# Altium PCB PowerSupply.PcbDoc (part 1 of 2)
Units mm, origin at the board's own origin, x right, y up, seen from the top; angles counter-clockwise.
Board outline 97.5 x 39.25 mm, 2 copper layers (Top Layer, Bottom Layer); 55 components, 29 nets, 126 pads, 14 vias.
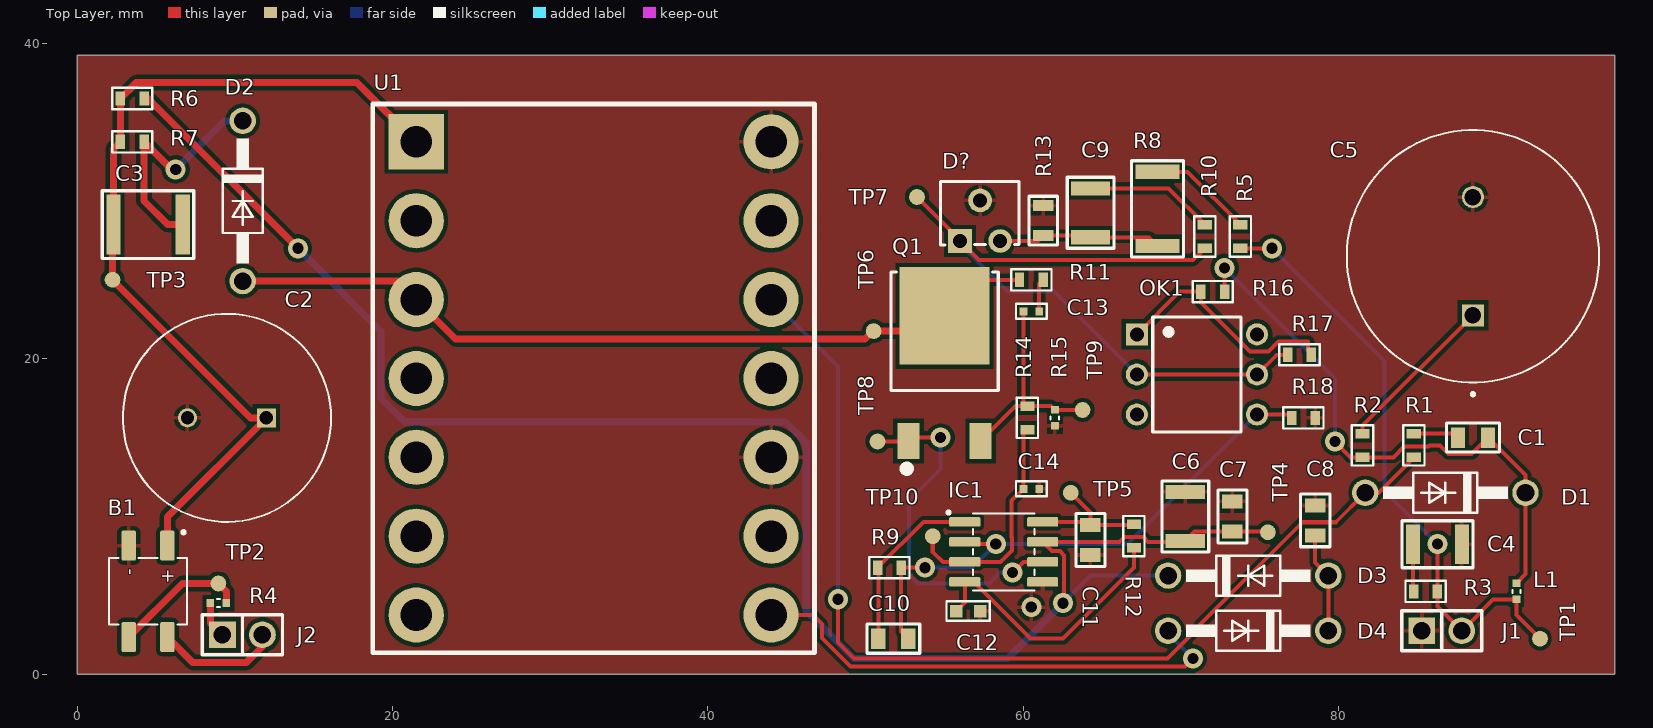
[diagram p0: Top Layer view]
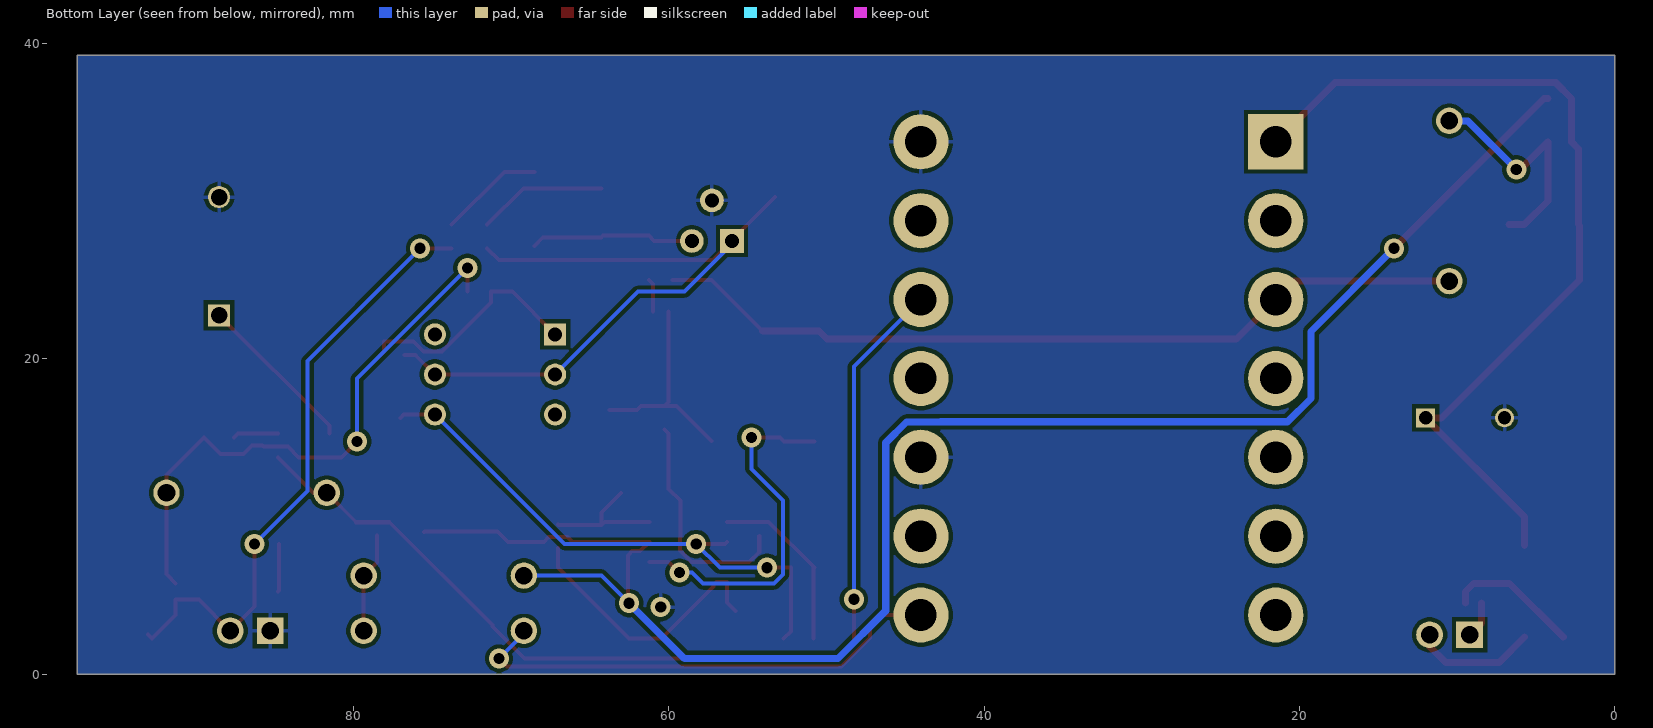
[diagram p1: Bottom Layer view, seen from below]

## Layer stack, top to bottom
Top Solder: solder mask 0.0102, Solder Resist, Dk 3.5
Top Layer: signal copper 0.0356
Dielectric 1: dielectric 0.32, FR-4, Dk 4.8
Bottom Layer: signal copper 0.0356
Bottom Solder: solder mask 0.0102, Solder Resist, Dk 3.5

## Board outline
0,0 97.5,0 97.5,39.25 0,39.25

## Design rules (kind name [scope] priority, off if disabled: settings)
Clearance [All] p1: gap=0.254 ignorepadtopadclearanceinfootprint=FALSE except(0: Arc-Hole Track-Hole SMDPad-Hole THPad-Hole Via-Hole Fill-Hole Poly-Hole Region-Hole Text-Hole)
Height [All] p1: minheight=0 maxheight=50 prefheight=5
PolygonConnect [All] p1: connectstyle=Relief reliefconductorwidth=0.254 reliefentries=4 polygonreliefangle="90 Angle" airgapwidth=0.254
RoutingVias [All] p1: holewidth=0.711 width=1.27 viastyle="Through Hole" minholewidth=0.711 minwidth=1.27 maxholewidth=0.711 maxwidth=1.27
SolderMaskExpansion [All] p1: expansion=0.102 istentingtop=FALSE
Width [All] p1: maxlimit=0.5 minlimit=0.254 preferedwidth=0.254
29 further rules are at their usual default settings.

## Components (designator, comment, footprint, x,y, rotation, side; value= is the part's Value field where it differs from the comment)
B1 "MB4S" MB4S 4.5,5.25 r270 top
C1 "1.5nF" C0805 88.5,15 r0 top
C2 "560uF" EEUFM1C222 9.5,16.25 r180 top
C3 "94nF" C1812 4.5,28.5 r180 top
C4 "100uF" C1210 86.25,8.25 r180 top
C5 "3.3mF" EEU-FC1A332S 88.5,26.5 r90 top
C6 "120uF" C1210 70.25,10 r270 top
C7 "22uF" C0805 73.25,10 r270 top
C8 "47uF" C0805 78.5,9.75 r270 top
C9 "4nF" C1210 64.25,29.25 r270 top
C10 "8nF" C0805 51.75,2.25 r180 top
C11 "10nF" C0805 64.25,8.5 r270 top
C12 "1.8n" C0603 56.5,4 r180 top
C13 "100pF" C0402 60.5,23 r0 top
C14 "100pF" C0402 60.5,11.75 r180 top
D1 "1N4004" 1N4004 86.75,11.5 r180 top
D2 "1N4004" 1N4004 10.5,30 r270 top
D3 "1N4004" 1N4004 74.25,6.25 r0 top
D4 "1N4004" 1N4004 74.25,2.75 r180 top
D? "TL431CZ-AP" TL431CZ-AP 57.25,28.75 r0 top
IC1 "UC3843D8" UC3843D8 58.75,7.75 r0 top
J1 "MC 1,5/ 2-G-3,81 P26 THR" "HEADER-1X2-FCI 77311-118-02LF" 85.25,2.75 r90 top
J2 "MC 1,5/ 2-G-3,81 P26 THR" "HEADER-1X2-FCI 77311-118-02LF" 9.21,2.5 r90 top
L1 "1nH" L0402 91.25,5.25 r270 top
OK1 "CNY17F-4" CNY17F-4 71,19 r0 top
Q1 "SIHD7N60E-GE3" SIHD7N60E-GE3 55,19.5 r0 top
R1 "50" R0603 84.75,14.5 r90 top
R2 "6m" R0603 81.5,14.5 r270 top
R3 "3.3m" R0603 85.5,5.25 r0 top
R4 "1R" R0402 8.96,4.5 r0 top
R5 "1.1k" R0603 73.75,27.75 r270 top
R6 "56k" R0603 3.5,36.5 r180 top
R7 "2.7k" R0603 3.5,33.75 r180 top
R8 "8.4k" R2010 68.5,29.5 r90 top
R9 "4K" R0603 51.5,6.75 r180 top
R10 "21k" R0603 71.5,27.75 r90 top
R11 "100" R0603 60.5,25 r180 top
R12 "6.8k" R0603 67,8.75 r90 top
R13 "2.49" R0805 61.25,28.75 r270 top
R14 "1k" R0603 60.25,16.25 r90 top
R15 "0R2" R0402 62,16.25 r90 top
R16 "2k" R0603 72,24.25 r0 top
R17 "1k" R0603 77.5,20.25 r180 top
R18 "2k" R0603 77.75,16.25 r0 top
TP1 "Vout" TestPoint 92.75,2.25 r0 top
TP2 "Vin-AC" TestPoint 8.96,5.75 r180 top
TP3 "Vin_DC" TestPoint 2.25,25 r90 top
TP4 "Vcc" TestPoint 75.5,9 r90 top
TP5 "Vref" TestPoint 63,11.5 r90 top
TP6 "Vd" TestPoint 50.5,21.75 r90 top
TP7 "Ver" TestPoint 53.25,30.25 r90 top
TP8 "Vg" TestPoint 50.75,14.75 r90 top
TP9 "Vs" TestPoint 63.75,16.75 r90 top
TP10 "Isense" TestPoint 54.25,8.75 r90 top
U1 "TF351-2C-2/12VDC" TF351-2C-2/12VDC 32.75,18.75 r0 top

## Footprints (in the part's own frame and the unit in brackets; to place one, negate y for a bottom-side part, rotate by r counter-clockwise, add the part's x,y. Pads: shape width x height; smd on the part's side, far side on the other; paste and mask are expansions set on the pad)
1N4004 [mil]
  round 66 hole 44: A(200,0) C(-200,0)
  silkscreen extent -155,-50 155,50, body extent -211,-53 203,53, height 110
C0402 [mm] "Guidelines for Footprint Design - Walsin Technology Corporation"
  rect 0.5x0.5 smd: 1(-0.5,0) 2(0.5,0)
  silkscreen extent -0.97,-0.48 0.97,0.48, body extent -0.5,-0.25 0.5,0.25, height 0.48
C0603 [mm] "Guidelines for Footprint Design - Walsin Technology Corporation"
  rect 0.8x0.8 smd: 1(-0.75,0) 2(0.75,0)
  silkscreen extent -1.38,-0.63 1.38,0.63, body extent -0.8,-0.4 0.8,0.4, height 0.79
C0805 [mm] "Guidelines for Footprint Design - Walsin Technology Corporation"
  rect 0.9x1.3 smd: 1(-0.95,0) 2(0.95,0)
  silkscreen extent -1.68,-0.92 1.68,0.92, body extent -1,-0.62 1,0.63, height 0.59
C1210 [mm]
  rect 0.9x2.5 smd: 1(-1.55,0) 2(1.55,0)
  silkscreen extent -2.25,-1.48 2.25,1.5, body extent -1.6,-1.25 1.6,1.25, height 0.79
C1812 [mm]
  rect 0.9x3.8 smd: 1(-2.2,0) 2(2.2,0)
  silkscreen extent -2.9,-2.15 2.9,2.15, body extent -2.25,-1.6 2.25,1.6, height 1
CNY17F-4 [mm]
  rect 1.4x1.4 hole 0.9: A(-3.81,2.54)
  round 1.4 hole 0.9: B(3.81,2.54) C(-3.81,0) C(3.81,0) E(3.81,-2.54) NC(-3.81,-2.54)
  silkscreen extent -2.8,-3.65 2.8,3.65, body extent -3.93,-4.27 3.94,4.27, height 5.89
EEU-FC1A332S [mm]
  round 1.4 hole 1.05: N(3.75,0)
  rect 1.4x1.4 / inner round 1.4 / far side rect 1.4x1.4 hole 1.05: P(-3.75,0)
  silkscreen extent -8.85,-8 8,8, body extent -8,-8 8,8, height 20
EEUFM1C222 [mm]
  round 1.2 hole 0.85: N(2.5,0)
  rect 1.2x1.2 hole 0.85: P(-2.5,0)
  silkscreen extent -6.6,-6.6 6.6,6.6, body extent -6.25,-6.25 6.25,6.25, height 25
"HEADER-1X2-FCI 77311-118-02LF" [mm]
  rect 1.7x1.7 hole 1.1: 1(0,0)
  round 1.7 hole 1.1: 2(0,-2.54)
  silkscreen extent -1.27,-3.81 1.27,1.27, body extent -1.27,-3.81 1.27,1.27, height 11.94
L0402 [mm]
  rect 0.475x0.5 smd: 1(-0.512,0) 2(0.512,0)
  silkscreen extent -0.1,-0.25 0.1,0.28, body extent -0.5,-0.25 0.5,0.25, height 0.56
MB4S [mm]
  rrect23% 1.91x0.91 smd: 1(-2.9,1.225) 2(-2.9,-1.225) 3(2.9,-1.225) 4(2.9,1.225)
  silkscreen extent -3.85,-2.48 2.1,2.48, body extent -3.35,-2.36 3.35,2.36, height 2.71
R0402 [mm]
  rect 0.475x0.5 smd: 1(-0.512,0) 2(0.512,0)
  silkscreen extent -0.1,-0.25 0.1,0.28, body extent -0.5,-0.25 0.5,0.25, height 0.35
R0603 [mm] "Guidelines for Footprint Design - Walsin Technology Corporation"
  rect 0.6x0.9 smd: 1(-0.75,0) 2(0.75,0)
  silkscreen extent -1.28,-0.67 1.28,0.67, body extent -0.8,-0.4 0.8,0.4, height 0.44
R0805 [mm] "Guidelines for Footprint Design - Walsin Technology Corporation"
  rect 0.7x1.3 smd: 1(-0.95,0) 2(0.95,0)
  silkscreen extent -1.55,-0.9 1.55,0.9, body extent -1,-0.62 1,0.65, height 0.59
R2010 [mm]
  rect 0.9x2.8 smd: 1(-2.35,0) 2(2.35,0)
  silkscreen extent -3.05,-1.65 3.05,1.65, body extent -2.5,-1.25 2.5,1.25, height 0.6
SIHD7N60E-GE3 [mil]
  rect 224.02x243.31 smd: D(0,126.67)
  rect 55x90 smd: G(-90,-185.73) S(90,-185.73)
  silkscreen extent -134,-263 134,236, body extent -133,-223 133,236, height 97
TestPoint [mm]
  round 1 smd paste-10 mask+0.1: 1(0,0)
TF351-2C-2/12VDC [mm]
  rect 3.5x3.5 hole 2: 1(-11.25,15)
  round 3.5 hole 2: 2(-11.25,10) 3(-11.25,5) 4(-11.25,0) 5(-11.25,-5) 6(-11.25,-10) 7(-11.25,-15) 8(11.25,15) 9(11.25,10) 10(11.25,5) 11(11.25,0) 12(11.25,-5) 13(11.25,-10) 14(11.25,-15)
  silkscreen extent -14,-17.4 14,17.4, body extent -14,-17.4 14,17.4, height 36.27
TL431CZ-AP [mm]
  round 1.5 hole 0.9: A(-0.002,1.288) R(1.273,-1.287)
  rect 1.5x1.5 hole 0.9: C(-1.272,-1.287)
  silkscreen extent -2.5,-1.54 2.47,2.49, body extent -2.48,-1.53 2.47,2.5, height 5.42
UC3843D8 [mm]
  rrect25% 1.97x0.6 smd: 1(-2.47,1.905) 2(-2.47,0.635) 3(-2.47,-0.635) 4(-2.47,-1.905) 5(2.47,-1.905) 6(2.47,-0.635) 7(2.47,0.635) 8(2.47,1.905)
  silkscreen extent -3.6,-2.45 1.95,2.6, body extent -3,-2.45 3,2.45, height 1.75

## Part data
B1: "Rectifier Bridge Diode Single 400V 0.5A 4-Pin SOIC N T/R / IC RECT BRIDGE 0.5A 400V 4SOIC", Manufacturer="ON Semiconductor / Fairchild", Reverse Voltage=400V, Category="Rectifier Diodes", ComponentLink1Description=https://datasheet.ciiva.com/4433/mb4s-186124-4433195.pdf?src-supplier=Mouser, ComponentLink1URL=https://datasheet.ciiva.com/4433/mb4s-186124-4433195.pdf?src-supplier=Mouser, ComponentLink2Description=https://datasheet.ciiva.com/17038/mb4s-17038344.pdf?src-supplier=Future+Electronics, ComponentLink2URL=https://datasheet.ciiva.com/17038/mb4s-17038344.pdf?src-supplier=Future+Electronics, ComponentLink3Description=https://datasheet.ciiva.com/1197/1794557-1197746.pdf?src-supplier=Farnell, ComponentLink3URL=https://datasheet.ciiva.com/1197/1794557-1197746.pdf?src-supplier=Farnell, ComponentLink4Description=https://datasheet.ciiva.com/15145/getdatasheetpartid-117252-15145288.pdf?src-supplier=Verical, ComponentLink4URL=https://datasheet.ciiva.com/15145/getdatasheetpartid-117252-15145288.pdf?src-supplier=Verical, ComponentLink5Description=https://datasheet.ciiva.com/11195/mb8s-11195767.pdf?src-supplier=Avnet, ComponentLink5URL=https://datasheet.ciiva.com/11195/mb8s-11195767.pdf?src-supplier=Avnet, ComponentLink6Description=https://datasheet.ciiva.com/8018/1827136-8018971.pdf?src-supplier=Element14, ComponentLink6URL=https://datasheet.ciiva.com/8018/1827136-8018971.pdf?src-supplier=Element14, ComponentLink7Description=https://datasheet.ciiva.com/43505/974489-43505307.pdf?src-supplier=Jameco, ComponentLink7URL=https://datasheet.ciiva.com/43505/974489-43505307.pdf?src-supplier=Jameco, ComponentLink8Description=https://datasheet.ciiva.com/885/mb1s-885510.pdf?src-supplier=Digikey, ComponentLink8URL=https://datasheet.ciiva.com/885/mb1s-885510.pdf?src-supplier=Digikey, ComponentLink9Description=https://datasheet.ciiva.com/885/mb1s-885511.pdf?src-supplier=Digikey, ComponentLink9URL=https://datasheet.ciiva.com/885/mb1s-885511.pdf?src-supplier=Digikey, ComponentLink10Description=https://datasheet.ciiva.com/885/mb1s-885512.pdf?src-supplier=Digikey, ComponentLink10URL=https://datasheet.ciiva.com/885/mb1s-885512.pdf?src-supplier=Digikey, ComponentLink11Description=https://datasheet.ciiva.com/11195/mb8s-11195766.pdf?src-supplier=Avnet, ComponentLink11URL=https://datasheet.ciiva.com/11195/mb8s-11195766.pdf?src-supplier=Avnet, Manufacturer Part Number=MB4S, Pricing 1="3000=0.114, 6000=0.111, 9000=0.11, 12000=0.109, 15000=0.106, 45000=0.106 (USD)", RoHS=Yes, Stock 1=6000, Supplier 1="Future Electronics"
C1: library part GRM21A5C2E152FWA1J, "General Up to 125C Reflow soldering Flow soldering", Manufacturer=Murata, Category="Ceramic Capacitors", Manufacturer Part Number=GRM21A5C2E152FWA1J, Pricing 1="1=0.29, 10=0.206, 50=0.206, 100=0.124, 1000=0.078, 10000=0.064 (USD)", RoHS=Yes, Stock 1=9850, Supplier 1=Mouser
C2: library part EEU-FM1C222, "Aluminum Electrolytic Capacitor, Polarized, Aluminum (wet), 25V, 20% +Tol, 20% -Tol, 560uF", Manufacturer=Panasonic, Voltage Rating (AC)=16V, Category="Aluminum Electrolytic Capacitors", ComponentLink1Description=https://datasheet.ciiva.com/11778/0900766b805f3abe-11778660.pdf?src-supplier=Rs, ComponentLink1URL=https://datasheet.ciiva.com/11778/0900766b805f3abe-11778660.pdf?src-supplier=Rs, ComponentLink2Description=https://datasheet.ciiva.com/24023/a-e-461514-24023525.pdf?src-supplier=Mouser, ComponentLink2URL=https://datasheet.ciiva.com/24023/a-e-461514-24023525.pdf?src-supplier=Mouser, ComponentLink3Description=https://datasheet.ciiva.com/10685/aba0000ce108-10685660.pdf?src-supplier=Avnet, ComponentLink3URL=https://datasheet.ciiva.com/10685/aba0000ce108-10685660.pdf?src-supplier=Avnet, ComponentLink4Description=https://datasheet.ciiva.com/46371/26036-46371896.pdf?src-supplier=Element14, ComponentLink4URL=https://datasheet.ciiva.com/46371/26036-46371896.pdf?src-supplier=Element14, ComponentLink5Description=https://datasheet.ciiva.com/94/aba0000ce108-94216.pdf?src-supplier=Digi-Key, ComponentLink5URL=https://datasheet.ciiva.com/94/aba0000ce108-94216.pdf?src-supplier=Digi-Key, ComponentLink6Description=https://datasheet.ciiva.com/30235/aba0000ce108-30235055.pdf?src-supplier=Onlinecomponents.com, ComponentLink6URL=https://datasheet.ciiva.com/30235/aba0000ce108-30235055.pdf?src-supplier=Onlinecomponents.com, ComponentLink7Description=https://datasheet.ciiva.com/14601/70068540-14601135.pdf?src-supplier=Allied+Electronics, ComponentLink7URL=https://datasheet.ciiva.com/14601/70068540-14601135.pdf?src-supplier=Allied+Electronics, ComponentLink8Description=https://datasheet.ciiva.com/16210/aba0000ce108-16210090.pdf?src-supplier=Future+Electronics, ComponentLink8URL=https://datasheet.ciiva.com/16210/aba0000ce108-16210090.pdf?src-supplier=Future+Electronics, Dissipation Factor=18%, Manufacturer Part Number=EEU-FM1C222, Pricing 1="1=1.04, 10=0.657, 50=0.657, 100=0.529, 1000=0.411, 10000=0.367 (USD)", RoHS=Yes, Stock 1=1570, Supplier 1=Mouser
C3: library part C1812C943KBGLCAUTO, "Cap, AEC-Q200, 0.094UF, 630V, 1812;", Manufacturer=KEMET, Manufacturer Part Number=C1812C943KBGLCAUTO, Pricing 1="1=3.57, 10=2.75, 50=2.48, 100=2.13, 1000=1.56, 10000=1.47 (USD)", RoHS=No, Stock 1=405, Supplier 1=Mouser
C4: library part GRM32ER60J107ME20L, "Multilayer Ceramic Capacitor, 100 uF, 6.3 V, ± 20%, X5R, 1210 [3225 Metric]", Case Code (Imperial)=1210, Case Code (Metric)=3225, Dielectric=X5R, Manufacturer=Murata, Max Operating Temperature=85°C, Min Operating Temperature=-55°C, Package Quantity=1, Tolerance=20%, Voltage=6.3V, Capacitance=100uF, Case/Package=1210, Category="Ceramic Capacitors", Depth=2.5mm, Height=2.5mm, Lead Free="Lead Free", Length=3.2mm, Manufacturer Part Number=GRM32ER60J107ME20L, Material=Ceramic, Mount="Surface Mount", Number of Pins=2, Packaging="Cut Tape", Pricing 1="1=1.4534, 10=1.0931, 25=0.9871, 100=0.5195 (USD)", Reach SVHC Compliant=No, RoHS=Yes, RoHS Compliant=Yes, Series=GRM, Stock 1=177, Supplier 1="Arrow Electronics", Termination=SMD/SMT, Thickness=0.106inch, Voltage Rating=6.3V, Voltage Rating (DC)=6.3V, Width=0.098inch
C5: library part EEU-FC1A332S, "Cap Aluminum 3300uF 10V 20% (16 X 20mm) Radial 7.5mm 2205mA 5000h 105°C Bulk", Case/Package=Radial, ESR (Equivalent Series Resistance)=29mR, Leakage Current=3uA, Manufacturer=Panasonic, Max Operating Temperature=105°C, Min Operating Temperature=-55°C, Package Quantity=100, Ripple Current=2.205A, Tolerance=20%, Voltage=10V, Capacitance=3.3mF, Category="Aluminum Electrolytic Capacitors", ComponentLink1Description=https://datasheet.ciiva.com/11781/0900766b80becf93-11781127.pdf?src-supplier=Rs, ComponentLink1URL=https://datasheet.ciiva.com/11781/0900766b80becf93-11781127.pdf?src-supplier=Rs, ComponentLink2Description=https://datasheet.ciiva.com/7961/aba0000ce22-7961340.pdf?src-supplier=Element14, ComponentLink2URL=https://datasheet.ciiva.com/7961/aba0000ce22-7961340.pdf?src-supplier=Element14, ComponentLink3Description=https://datasheet.ciiva.com/43470/1790611-43470763.pdf?src-supplier=Farnell, ComponentLink3URL=https://datasheet.ciiva.com/43470/1790611-43470763.pdf?src-supplier=Farnell, ComponentLink4Description=https://datasheet.ciiva.com/46379/1790611-46379261.pdf?src-supplier=Element14, ComponentLink4URL=https://datasheet.ciiva.com/46379/1790611-46379261.pdf?src-supplier=Element14, ComponentLink5Description=https://datasheet.ciiva.com/24068/a-e-461514-24068731.pdf?src-supplier=Mouser, ComponentLink5URL=https://datasheet.ciiva.com/24068/a-e-461514-24068731.pdf?src-supplier=Mouser, ComponentLink6Description=https://datasheet.ciiva.com/14590/70068429-14590057.pdf?src-supplier=Allied+Electronics, ComponentLink6URL=https://datasheet.ciiva.com/14590/70068429-14590057.pdf?src-supplier=Allied+Electronics, ComponentLink7Description=https://datasheet.ciiva.com/11677/aba0000ce22-11677685.pdf?src-supplier=Avnet, ComponentLink7URL=https://datasheet.ciiva.com/11677/aba0000ce22-11677685.pdf?src-supplier=Avnet, ComponentLink8Description=https://datasheet.ciiva.com/15166/getdatasheetpartid-178475-15166218.pdf?src-supplier=Verical, ComponentLink8URL=https://datasheet.ciiva.com/15166/getdatasheetpartid-178475-15166218.pdf?src-supplier=Verical, ComponentLink9Description=https://datasheet.ciiva.com/30242/aba0000ce22-30242043.pdf?src-supplier=Onlinecomponents.com, ComponentLink9URL=https://datasheet.ciiva.com/30242/aba0000ce22-30242043.pdf?src-supplier=Onlinecomponents.com, ComponentLink10Description=https://datasheet.ciiva.com/29243/421921-da-01-en-elko-fc-3300uf-10v-105c-29243146.pdf?src-supplier=Conrad, ComponentLink10URL=https://datasheet.ciiva.com/29243/421921-da-01-en-elko-fc-3300uf-10v-105c-29243146.pdf?src-supplier=Conrad, Construction=RADIAL, Diameter=16mm, Dissipation Factor=0.19%, Height=20mm, Height - Seated (Max)=0.787inch, Impedance=29mR, Lead Diameter=0.8mm, Lead Free="Lead Free", Lead Pitch=7.5mm, Length=20mm, Life (Hours)=5000Hour, Manufacturer Part Number=EEU-FC1A332S, Mount="Through Hole,PCB", Packaging=Bulk, Pricing 1="1=1.36, 10=0.888, 50=0.888, 100=0.694, 1000=0.536, 10000=0.482 (USD)", Radiation Hardening=No, Reach SVHC Compliant=Unknown, RoHS=Yes, RoHS Compliant=Yes, Series=FC, Stock 1=15, Supplier 1=Mouser, Termination=Radial, Voltage Rating=10V, Voltage Rating (DC)=10V
C6: library part 6TPE120MAZB, "120uF SMD Solid Polymer Tantalum Capacitor; 6.3 V dc +/-20%; POSCAP Series", Manufacturer=Panasonic, Category="Polymer Capacitors", ComponentLink1Description=https://datasheet.ciiva.com/22745/1734363-22745336.pdf?src-supplier=Element14, ComponentLink1URL=https://datasheet.ciiva.com/22745/1734363-22745336.pdf?src-supplier=Element14, ComponentLink2Description=https://datasheet.ciiva.com/25785/1734363-25785911.pdf?src-supplier=Farnell, ComponentLink2URL=https://datasheet.ciiva.com/25785/1734363-25785911.pdf?src-supplier=Farnell, ComponentLink3Description=https://datasheet.ciiva.com/24378/tpe-series-datasheet-24378493.pdf?src-supplier=Onlinecomponents.com, ComponentLink3URL=https://datasheet.ciiva.com/24378/tpe-series-datasheet-24378493.pdf?src-supplier=Onlinecomponents.com, Life (Hours)=1000Hour, Manufacturer Part Number=6TPE120MAZB, Pricing 1="1=1.09, 10=0.797, 50=0.797, 100=0.631, 1000=0.45, 10000=0.39 (USD)", RoHS=Yes, Stock 1=2995, Supplier 1=Mouser
C7: library part GRM21BR60J226ME39L, "Multilayer Ceramic Capacitors MLCC Surface Mount 0805 22uF 6.3 Volts X5R 20%", Case Code (Imperial)=0805, Case Code (Metric)=2012, Dielectric=X5R, Manufacturer=Murata, Max Operating Temperature=85°C, Min Operating Temperature=-55°C, Package Quantity=1, Tolerance=20%, Voltage=6.3V, Capacitance=22uF, Case/Package=0805, Category="Ceramic Capacitors", Construction=Flat, Depth=1.25mm, Height=1.25mm, Lead Free="Lead Free", Length=2mm, Manufacturer Part Number=GRM21BR60J226ME39L, Material=Ceramic, Mount="Surface Mount", Packaging="Tape and Reel", Pricing 1="3000=0.0699, 6000=0.0677, 9000=0.054, 15000=0.039, 30000=0.037, 75000=0.033, 150000=0.0327 (USD)", Radiation Hardening=No, Reach SVHC Compliant=No, RoHS=Yes, RoHS Compliant=Yes, Series=GRM, Stock 1=282000, Supplier 1="Arrow Electronics", Termination=SMD/SMT, Thickness=0.053inch, Voltage Rating=6.3V, Voltage Rating (DC)=6.3V, Width=0.049inch
C8: library part JMK212BJ476MG-T, "Multilayer Ceramic Capacitors MLCC - SMD/SMT 47uF 6.3V X5R +/-20% 0805 Gen Purp", Case Code (Imperial)=0805, Case Code (Metric)=2012, Dielectric=X5R, Manufacturer="Taiyo Yuden", Max Operating Temperature=85°C, Min Operating Temperature=-55°C, Tolerance=20%, Voltage Rating=6.3V, Capacitance=47uF, Case/Package=0805, Category="Ceramic Capacitors", Construction=Flat, Depth=1.25mm, Height=1.25mm, Lead Free="Lead Free", Length=2mm, Manufacturer Part Number=JMK212BJ476MG-T, Mount="Surface Mount", Number of Pins=2, Packaging="Tape and Reel", Pricing 1="3000=0.11801, 6000=0.11536, 12000=0.11006, 18000=0.10741, 24000=0.10475 (USD)", Radiation Hardening=No, Reach SVHC Compliant=Unknown, RoHS=Yes, RoHS Compliant=Yes, Series=M, Stock 1=159000, Supplier 1=Avnet, Termination=SMD/SMT, Voltage Rating (DC)=6.3V
C9: library part B72530T0060M062, "Epcos CT Series Metal OxideVaristor 4nF 2.5A, Clamping 25V, Varistor 11V 1210 Case", Case/Package=1210, Clamping Current=2.5A, Clamping Voltage=25V, Manufacturer="TDK EPCOS", Max Operating Temperature=125°C, Max Surge Current=300A, Max Varistor Voltage=13.2V, Max Voltage Rating (AC)=6V, Max Voltage Rating (DC)=8V, Min Operating Temperature=-55°C, Min Varistor Voltage=8.8V, Varistor Voltage=11V, Capacitance=4nF, Category=Varistors, ComponentLink1Description=https://datasheet.ciiva.com/26819/getdatasheetpartid-382608-26819931.pdf?src-supplier=Verical, ComponentLink1URL=https://datasheet.ciiva.com/26819/getdatasheetpartid-382608-26819931.pdf?src-supplier=Verical, Depth=2.5mm, Energy=0.7J, Length=3.2mm, Manufacturer Part Number=B72530T0060M062, Mount="Surface Mount", Number of Circuits=1, Packaging="Tape and Reel", Pricing 1="5=5, 50=1.5, 250=1.26, 500=1.02, 1500=1 (EUR)", RoHS=Yes, RoHS Compliant=Yes, Series=-, Size Code=1210, Stock 1=1532, Supplier 1=Farnell
C10: library part C0805C103K2RACTU, "Multilayer Ceramic Capacitor, 0.01 uF, 200 V, ± 10%, X7R, 0805 [2012 Metric]", Capacitance=10nF, Case Code (Imperial)=0805, Case Code (Metric)=2012, Dielectric=X7R, Manufacturer=KEMET, Max Operating Temperature=125°C, Min Operating Temperature=-55°C, Package Quantity=4000, Temperature Coefficient=30ppm/°C, Tolerance=10%, Voltage Rating=200V, Case/Package=0805, Category="Ceramic Capacitors", ComponentLink1Description=https://datasheet.ciiva.com/22700/1851736-22700517.pdf?src-supplier=Element14, ComponentLink1URL=https://datasheet.ciiva.com/22700/1851736-22700517.pdf?src-supplier=Element14, ComponentLink2Description=https://datasheet.ciiva.com/28672/1851736-28672827.pdf?src-supplier=Element14, ComponentLink2URL=https://datasheet.ciiva.com/28672/1851736-28672827.pdf?src-supplier=Element14, Construction=Flat, Depth=1.25mm, Dissipation Factor=2.5%, Height=0.78mm, Lead Pitch=0.75mm, Length=2mm, Manufacturer Part Number=C0805C103K2RACTU, Material=4241ConductorMaterial, Mount="Surface Mount", Number of Pins=2, Packaging="Tape and Reel", Pricing 1="1=0.18, 10=0.128, 50=0.128, 100=0.06, 1000=0.035, 10000=0.026 (USD)", Radiation Hardening=No, Reach SVHC Compliant=No, RoHS=Yes, RoHS Compliant=Yes, Series="SMD Comm X7R", Stock 1=28830, Supplier 1=Mouser, Termination=SMD/SMT, Thickness=0.035inch, Voltage Rating (DC)=200V, Width=1.2mm
C11: library part C0805C103K2RACTU, "Multilayer Ceramic Capacitor, 0.01 uF, 200 V, ± 10%, X7R, 0805 [2012 Metric]", Case Code (Imperial)=0805, Case Code (Metric)=2012, Dielectric=X7R, Manufacturer=KEMET, Max Operating Temperature=125°C, Min Operating Temperature=-55°C, Package Quantity=4000, Temperature Coefficient=30ppm/°C, Tolerance=10%, Voltage Rating=200V, Capacitance=10nF, Case/Package=0805, Category="Ceramic Capacitors", ComponentLink1Description=https://datasheet.ciiva.com/22700/1851736-22700517.pdf?src-supplier=Element14, ComponentLink1URL=https://datasheet.ciiva.com/22700/1851736-22700517.pdf?src-supplier=Element14, ComponentLink2Description=https://datasheet.ciiva.com/28672/1851736-28672827.pdf?src-supplier=Element14, ComponentLink2URL=https://datasheet.ciiva.com/28672/1851736-28672827.pdf?src-supplier=Element14, Construction=Flat, Depth=1.25mm, Dissipation Factor=2.5%, Height=0.78mm, Lead Pitch=0.75mm, Length=2mm, Manufacturer Part Number=C0805C103K2RACTU, Material=4241ConductorMaterial, Mount="Surface Mount", Number of Pins=2, Packaging="Tape and Reel", Pricing 1="1=0.18, 10=0.128, 50=0.128, 100=0.06, 1000=0.035, 10000=0.026 (USD)", Radiation Hardening=No, Reach SVHC Compliant=No, RoHS=Yes, RoHS Compliant=Yes, Series="SMD Comm X7R", Stock 1=28830, Supplier 1=Mouser, Termination=SMD/SMT, Thickness=0.035inch, Voltage Rating (DC)=200V, Width=1.2mm
C12: library part GRM1885C1H112JA01D, "Multilayer Ceramic Capacitor, 1100 pF, 50 V, ± 5%, C0G (NP0), 0603 [1608 Metric]", Manufacturer=Murata, Temperature Coefficient=30ppm/°C, Category="Ceramic Capacitors", ComponentLink1Description=https://datasheet.ciiva.com/133/product-133472.pdf?src-supplier=Digikey, ComponentLink1URL=https://datasheet.ciiva.com/133/product-133472.pdf?src-supplier=Digikey, ComponentLink2Description=https://datasheet.ciiva.com/11621/product-11621253.pdf?src-supplier=Avnet, ComponentLink2URL=https://datasheet.ciiva.com/11621/product-11621253.pdf?src-supplier=Avnet, ComponentLink3Description=https://datasheet.ciiva.com/133/partnumbering-e-01-133471.pdf?src-supplier=Digikey, ComponentLink3URL=https://datasheet.ciiva.com/133/partnumbering-e-01-133471.pdf?src-supplier=Digikey, ComponentLink4Description=https://datasheet.ciiva.com/133/partnumbering-e-01-133473.pdf?src-supplier=Digikey, ComponentLink4URL=https://datasheet.ciiva.com/133/partnumbering-e-01-133473.pdf?src-supplier=Digikey, Manufacturer Part Number=GRM1885C1H112JA01D, Pricing 1="4000=0.0091, 8000=0.0082, 24000=0.0072, 100000=0.0055 (USD)", RoHS=Yes, Stock 1=40000, Supplier 1="Arrow Electronics"
C13 C14: library part GRM1555C1H101JA01D, "Multilayer Ceramic Capacitor, 100 pF, 50 V, ± 5%, C0G (NP0), 0402 [1005 Metric]", Case Code (Imperial)=0402, Case Code (Metric)=1005, Dielectric=C0G, Manufacturer=Murata, Max Operating Temperature=125°C, Min Operating Temperature=-55°C, Package Quantity=1, Tolerance=5%, Voltage=50V, Capacitance=100pF, Case/Package=0402, Category="Ceramic Capacitors", Construction=Flat, Depth=0.5mm, Height=0.5mm, Lead Free="Lead Free", Length=1mm, Manufacturer Part Number=GRM1555C1H101JA01D, Material=Ceramic, Mount="Surface Mount", Packaging="Tape and Reel", Pricing 1="10000=0.004, 20000=0.0035, 30000=0.0034, 50000=0.003, 100000=0.0024, 250000=0.002 (USD)", Radiation Hardening=No, Reach SVHC Compliant=No, RoHS=Yes, RoHS Compliant=Yes, Series=GRM, Stock 1=6040000, Supplier 1="Arrow Electronics", Termination=SMD/SMT, Thickness=0.022inch, Voltage Rating=50V, Voltage Rating (DC)=50V, Width=0.02inch
D1 D2 D3 D4: "Rectifier Diode, 1 Element, 1A, 400V V(RRM), Silicon, DO-41", Manufacturer=Diotec, Category="Rectifier Diodes", ComponentLink1Description=https://datasheet.ciiva.com/18711/1n400x-eng-tds-18711215.pdf?src-supplier=Distrelec, ComponentLink1URL=https://datasheet.ciiva.com/18711/1n400x-eng-tds-18711215.pdf?src-supplier=Distrelec, ComponentLink2Description=https://datasheet.ciiva.com/29316/162248-da-01-ml-1n4004-silizium-diode-de-en-29316437.pdf?src-supplier=Conrad, ComponentLink2URL=https://datasheet.ciiva.com/29316/162248-da-01-ml-1n4004-silizium-diode-de-en-29316437.pdf?src-supplier=Conrad, Manufacturer Part Number=1N4004, Pricing 1="1=0.1, 10=0.068, 50=0.068, 100=0.057, 1000=0.039, 10000=0.019 (USD)", RoHS=Yes, Stock 1=64524, Supplier 1=Mouser
D?: "V-Ref Adjustable 2.495V to 36V 100mA 3-Pin TO-92 Ammo", Case/Package=TO-92, Cathode Current=1mA, Manufacturer=STMicroelectronics, Max Input Voltage=37V, Max Operating Temperature=70°C, Max Output Current=100mA, Max Output Voltage=36V, Min Operating Temperature=0°C, Min Output Voltage=2.495V, Package Quantity=2000, Temperature Coefficient=100ppm/°C, Tolerance=2.21%, Accuracy=2%, Category="Voltage References", ComponentLink1Description=https://datasheet.ciiva.com/4909/cd00000986-4909435.pdf?src-supplier=Mouser, ComponentLink1URL=https://datasheet.ciiva.com/4909/cd00000986-4909435.pdf?src-supplier=Mouser, ComponentLink2Description=https://datasheet.ciiva.com/2011/cd00000986-2011433.pdf?src-supplier=Digikey, ComponentLink2URL=https://datasheet.ciiva.com/2011/cd00000986-2011433.pdf?src-supplier=Digikey, Lead Free="Lead Free", Manufacturer Part Number=TL431CZ-AP, Mount="Through Hole", Number of Channels=1, Output Current=100mA, Output Impedance=500mR, Output Type=Adjustable, Output Voltage=36V, Packaging="Cut Tape", Pricing 1="1=0.46, 10=0.341, 50=0.341, 100=0.23, 1000=0.143, 10000=0.116 (USD)", Reference Type=Shunt,Adjustable, Reference Voltage=2.495V, RoHS=Yes, RoHS Compliant=Yes, Series=-, Stock 1=652, Supplier 1=Mouser, Supply Current=100mA
IC1: "Single ended 500KHz current mode PWM controller with 8.4V/7.6V UVLO 100% duty cycle, 0C to 70C 8-SOIC 0 to 70", Case/Package=D, Frequency=450kHz, Input Current=11mA, Manufacturer="Texas Instruments", Max Frequency=500kHz, Max Operating Temperature=70°C, Max Supply Voltage=30V, Min Operating Temperature=0°C, Min Supply Voltage=12V, Output Current=1A, Output Voltage=5V, Package Quantity=75, Power Dissipation=650mW, Category="Voltage Regulators - Switching", ComponentLink1Description=https://datasheet.ciiva.com/15108/getdatasheetpartid-234476-15108333.pdf?src-supplier=Verical, ComponentLink1URL=https://datasheet.ciiva.com/15108/getdatasheetpartid-234476-15108333.pdf?src-supplier=Verical, ComponentLink2Description=https://datasheet.ciiva.com/41463/001015242-da-01-en-ic-reg-ctrlr-pwm-cm-uc3843d8-soic-8-tid-41463081.pdf?src-supplier=Conrad, ComponentLink2URL=https://datasheet.ciiva.com/41463/001015242-da-01-en-ic-reg-ctrlr-pwm-cm-uc3843d8-soic-8-tid-41463081.pdf?src-supplier=Conrad, ComponentLink3Description=https://datasheet.ciiva.com/1513/1863689-1513191.pdf?src-supplier=Element14, ComponentLink3URL=https://datasheet.ciiva.com/1513/1863689-1513191.pdf?src-supplier=Element14, ComponentLink4Description=https://datasheet.ciiva.com/2015/uc3842-2015741.pdf?src-supplier=Digikey, ComponentLink4URL=https://datasheet.ciiva.com/2015/uc3842-2015741.pdf?src-supplier=Digikey, ComponentLink5Description=https://datasheet.ciiva.com/14264/slus223c-14264762.pdf?src-supplier=Avnet, ComponentLink5URL=https://datasheet.ciiva.com/14264/slus223c-14264762.pdf?src-supplier=Avnet, Duty Cycle=100%, Fall Time=50ns, Lead Free="Lead Free", Manufacturer Part Number=UC3843D8, Max Duty Cycle=100%, Number of Outputs=1, Number of Pins=8, Operating Supply Current=11mA, Packaging=Rail/Tube, Pricing 1="1=1.57, 10=1.33, 50=1.33, 100=1.02, 1000=0.901, 10000=0.624 (USD)", Quiescent Current=11mA, Radiation Hardening=No, Reach SVHC Compliant=No, Rise Time=50ns, RoHS=Yes, RoHS Compliant=Yes, Series=-, Stock 1=471, Supplier 1=Mouser, Switching Frequency=500kHz, Topology=Buck-Boost,Flyback, Weight=0.002561oz
J1 J2: library part "2 wire-to-board connector", "MC 1,5/ 2-G-3,81 P26 THR - Wire-To-Board Connector, Horizontal, 3.81 mm, 2 Contacts, Header, MC Series, Through Hole, 1 Rows", Current Rating="8 A", Flammability Rating="UL 94 V-0", Manufacturer="PHOENIX CONTACT", Operating Temperature Range="- 65 C to + 125 C", Supplier Part Number=1792936, Supplier Part Number 1=649-77311-118-02LF, Voltage Rating="160 V", Brand="PHOENIX CONTACT", Category="Wire-To-Board Connectors", ComponentLink=http://ro.farnell.com/phoenix-contact/mc-1-5-2-g-3-81-p26-thr/header-horizontal-3-81mm-2way/dp/1792936, Contact Gender="Pin (Male)", Contact Material=Tin, Contact Plating="Tin Plated Contacts", Housing Material=Thermoplastic, Manufacturer Part Number="MC 1,5/ 2-G-3,81 P26 THR", Mounting Angle=Horizontal, Mounting Style="Through Hole", Number of Positions="2 Position", Number of Rows="1 Row", Packaging=Bulk, Pitch="3.81 mm", Pricing 1="1=0.180, 10=0.125, 100=0.103, 500=0.099, 1000=0.081, 2000=0.074, 5000=0.066, 10000=0.062, 25000=0.057 (USD)", Product=Headers, Product Category="Wire-To-Board Connectors", Reeling=False, RoHS="RoHS Compliant", RoHS - Mouser=Y, Series="MC Series", Standard Pack Qty=1000, Stock 1=1.987, Supplier=Farnell, Supplier 1=Mouser, Supplier 2=Digi-Key, Supplier Part Number 2=609-4434-ND, Termination Post Length="3.05 mm", Termination Style="Through Hole"
L1: library part LQG15HS1N0S02D, "Inductor RF Chip Multi-Layer 1nH 0.3nH 100MHz 8Q-Factor Air 1A 70mOhm DCR 0402 T/R", Case Code (Imperial)=0402, Case Code (Metric)=1005, Current Rating=300mA, DC Resistance (DCR)=70mR, Manufacturer=Murata, Max Operating Temperature=125°C, Min Operating Temperature=-55°C, Package Quantity=1, Self Resonant Frequency=10GHz, Test Frequency=100MHz, Case/Package=0402, Category="Fixed Inductors", ComponentLink1Description=https://datasheet.ciiva.com/11799/0900766b8090d53b-11799750.pdf?src-supplier=Rs, ComponentLink1URL=https://datasheet.ciiva.com/11799/0900766b8090d53b-11799750.pdf?src-supplier=Rs, ComponentLink2Description=https://datasheet.ciiva.com/27054/1864353-27054316.pdf?src-supplier=Jameco, ComponentLink2URL=https://datasheet.ciiva.com/27054/1864353-27054316.pdf?src-supplier=Jameco, ComponentLink3Description=https://datasheet.ciiva.com/1038/l0075s0083lqg15hs-1038134.pdf?src-supplier=Digikey, ComponentLink3URL=https://datasheet.ciiva.com/1038/l0075s0083lqg15hs-1038134.pdf?src-supplier=Digikey, ComponentLink4Description=https://datasheet.ciiva.com/1038/l0075s0083lqg15hs-1038133.pdf?src-supplier=Digikey, ComponentLink4URL=https://datasheet.ciiva.com/1038/l0075s0083lqg15hs-1038133.pdf?src-supplier=Digikey, ComponentLink5Description=https://datasheet.ciiva.com/1038/l0075s0083lqg15hs-1038135.pdf?src-supplier=Digikey, ComponentLink5URL=https://datasheet.ciiva.com/1038/l0075s0083lqg15hs-1038135.pdf?src-supplier=Digikey, ComponentLink6Description=https://datasheet.ciiva.com/4979/o05e-4979757.pdf?src-supplier=Mouser, ComponentLink6URL=https://datasheet.ciiva.com/4979/o05e-4979757.pdf?src-supplier=Mouser, ComponentLink7Description=https://datasheet.ciiva.com/3082/l0075s0083lqg15hs-3082177.pdf?src-supplier=Avnet, ComponentLink7URL=https://datasheet.ciiva.com/3082/l0075s0083lqg15hs-3082177.pdf?src-supplier=Avnet, Core Material=Air, DC Current=300mA, Depth=0.55mm, Height=0.5mm, Height - Seated (Max)=0.022inch, Inductance=1nH, Lead Free="Lead Free", Length=1mm, Manufacturer Part Number=LQG15HS1N0S02D, Max DC Current=300mA, Military Standard=Not, Mount="Surface Mount", Packaging="Tape and Reel", Pricing 1="10000=0.0155, 30000=0.0152, 50000=0.0151 (USD)", Q Factor=8, Radiation Hardening=No, Rated Current-Max=300mA, RoHS=Yes, RoHS Compliant=Yes, Series=LQG15HS, Shielding=Unshielded, Stock 1=20000, Supplier 1="Arrow Electronics", Termination=SMD/SMT, Width=0.02inch
OK1: "VISHAY CNY17F-4 Transistor Output Optocoupler, 1 Channel, DIP, 6 Pins, 60 mA, 5 kV, 160 %", Manufacturer="Vishay Semiconductors", Category=Optocouplers, Manufacturer Part Number=CNY17F-4, Pricing 1="1=0.66, 10=0.437, 50=0.437, 100=0.289, 1000=0.228, 10000=0.19 (USD)", RoHS=No, Stock 1=2627, Supplier 1=Mouser
Q1: "MOSFET N-CH 600V 7A TO-252", Manufacturer="Vishay Siliconix", Category=MOSFETs, ComponentLink1Description=https://datasheet.ciiva.com/23724/sihd7n60e-23724242.pdf?src-supplier=Newark, ComponentLink1URL=https://datasheet.ciiva.com/23724/sihd7n60e-23724242.pdf?src-supplier=Newark, ComponentLink2Description=https://datasheet.ciiva.com/8024/sihd7n60e-8024248.pdf?src-supplier=Element14, ComponentLink2URL=https://datasheet.ciiva.com/8024/sihd7n60e-8024248.pdf?src-supplier=Element14, ComponentLink3Description=https://datasheet.ciiva.com/6385/sihd7n60e-6385853.pdf?src-supplier=Digikey, ComponentLink3URL=https://datasheet.ciiva.com/6385/sihd7n60e-6385853.pdf?src-supplier=Digikey, Manufacturer Part Number=SIHD7N60E-GE3, Pricing 1="1=1.93, 10=1.56, 50=1.56, 100=1.26, 1000=0.871, 10000=0.81 (USD)", RoHS=Yes, Stock 1=503, Supplier 1=Mouser
R1: library part CRCW060350R0FKEA, "SMD Chip Resistor, 50 Ohm, ± 1%, 100 mW, 0603 [1608 Metric], Thick Film, General Purpose", Case Code (Imperial)=0603, Case Code (Metric)=1608, Manufacturer="Vishay Dale", Max Operating Temperature=155°C, Max Power Dissipation=100mW, Min Operating Temperature=-55°C, Package Quantity=5000, Resistance=50R, Resistance Tolerance=1%, Resistor Type="Thick Film", Temperature Coefficient=100ppm/°C, Voltage Rating=75V, Case/Package=0603, Category="Chip SMD Resistors", ComponentLink1Description=https://datasheet.ciiva.com/7657/1786679-7657103.pdf?src-supplier=Element14, ComponentLink1URL=https://datasheet.ciiva.com/7657/1786679-7657103.pdf?src-supplier=Element14, ComponentLink2Description=https://datasheet.ciiva.com/7792/1359338-7792320.pdf?src-supplier=Element14, ComponentLink2URL=https://datasheet.ciiva.com/7792/1359338-7792320.pdf?src-supplier=Element14, ComponentLink3Description=https://datasheet.ciiva.com/22665/1697183-22665684.pdf?src-supplier=Element14, ComponentLink3URL=https://datasheet.ciiva.com/22665/1697183-22665684.pdf?src-supplier=Element14, ComponentLink4Description=https://datasheet.ciiva.com/6195/dcrcwe3-6195095.pdf?src-supplier=Farnell, ComponentLink4URL=https://datasheet.ciiva.com/6195/dcrcwe3-6195095.pdf?src-supplier=Farnell, ComponentLink5Description=https://datasheet.ciiva.com/16720/70201119-16720645.pdf?src-supplier=Allied+Electronics, ComponentLink5URL=https://datasheet.ciiva.com/16720/70201119-16720645.pdf?src-supplier=Allied+Electronics, ComponentLink6Description=https://datasheet.ciiva.com/5550/dcrcwe3-109170-5550010.pdf?src-supplier=Mouser, ComponentLink6URL=https://datasheet.ciiva.com/5550/dcrcwe3-109170-5550010.pdf?src-supplier=Mouser, ComponentLink7Description=https://datasheet.ciiva.com/6195/1359338-6195078.pdf?src-supplier=Farnell, ComponentLink7URL=https://datasheet.ciiva.com/6195/1359338-6195078.pdf?src-supplier=Farnell, ComponentLink8Description=https://datasheet.ciiva.com/16784/70201119-16784459.pdf?src-supplier=Allied+Electronics, ComponentLink8URL=https://datasheet.ciiva.com/16784/70201119-16784459.pdf?src-supplier=Allied+Electronics, ComponentLink9Description=https://datasheet.ciiva.com/16494/dcrcwe3-16494475.pdf?src-supplier=Future+Electronics, ComponentLink9URL=https://datasheet.ciiva.com/16494/dcrcwe3-16494475.pdf?src-supplier=Future+Electronics, Contact Plating=Tin, Depth=0.85mm, Features="Automotive AEC-Q200", Height=0.45mm, Lead Free="Lead Free", Length=1.55mm, Manufacturer Part Number=CRCW060350R0FKEA, Number of Pins=2, Number of Terminations=2, Packaging="Tape and Reel", Power Rating=100mW, Pricing 1="1=0.1, 10=0.028, 50=0.028, 100=0.017, 1000=0.011, 10000=0.009 (USD)", Radiation Hardening=No, Reach SVHC Compliant=No, RoHS=Yes, RoHS Compliant=Yes, Series=CRCW, Size Code=0603, Stock 1=142146, Supplier 1=Mouser, Technology="THICK FILM", Termination=SMD/SMT, Tolerance=1%, Voltage Rating (DC)=75V, Weight=7.1E-05oz, Width=0.85mm
R2: library part PA0603FRM570R006L, "Resistor Current Sense Metal Substrate 0603 6mOhm ±1% 1/2W ±50ppm/°C Paper T/R Automotive", Manufacturer=Yageo, Category="Chip SMD Resistors", ComponentLink1Description=https://datasheet.octopart.com/PA0603FRM570R006L-Yageo-datasheet-86814980.pdf, ComponentLink1URL=https://datasheet.octopart.com/PA0603FRM570R006L-Yageo-datasheet-86814980.pdf, Manufacturer Part Number=PA0603FRM570R006L, Pricing 1="5000=0.10194 (USD)", Supplier 1=Digikey
R3: library part CRGCQ0603J3M3, "SMD Chip Resistor, 3.3 MOhm, ± 5%, 100 mW, 0603 [1608 Metric], Thick Film, General Purpose", Manufacturer="TE Connectivity", Operating Supply Voltage=75V, Power Rating=100mW, Category="Chip SMD Resistors", ComponentLink1Description=https://4donline.ihs.com/images/VipMasterIC/IC/TYEL/TYEL-S-A0004929575/TYEL-S-A0004929575-1.pdf?hkey=52A5661711E402568146F3353EA87419&src-supplier=Farnell, ComponentLink1URL=https://4donline.ihs.com/images/VipMasterIC/IC/TYEL/TYEL-S-A0004929575/TYEL-S-A0004929575-1.pdf?hkey=52A5661711E402568146F3353EA87419&src-supplier=Farnell, ComponentLink2Description=https://www.te.com/commerce/DocumentDelivery/DDEController?Action=srchrtrv&DocNm=1773204-3&DocType=DS&DocLang=English&src-supplier=Digikey, ComponentLink2URL=https://www.te.com/commerce/DocumentDelivery/DDEController?Action=srchrtrv&DocNm=1773204-3&DocType=DS&DocLang=English&src-supplier=Digikey, ComponentLink3Description=https://www.te.com/commerce/DocumentDelivery/DDEController?Action=srchrtrv&amp;DocNm=1773204-3&amp;DocType=DS&amp;DocLang=English&src-supplier=Digikey, ComponentLink3URL=https://www.te.com/commerce/DocumentDelivery/DDEController?Action=srchrtrv&amp;DocNm=1773204-3&amp;DocType=DS&amp;DocLang=English&src-supplier=Digikey, ComponentLink4Description=https://4donline.ihs.com/images/VipMasterIC/IC/TYEL/TYEL-S-A0004929575/TYEL-S-A0004929575-1.pdf?hkey=52A5661711E402568146F3353EA87419&src-supplier=Newark, ComponentLink4URL=https://4donline.ihs.com/images/VipMasterIC/IC/TYEL/TYEL-S-A0004929575/TYEL-S-A0004929575-1.pdf?hkey=52A5661711E402568146F3353EA87419&src-supplier=Newark, ComponentLink5Description=https://datasheet.octopart.com/CRGCQ0603J3M3-TE-Connectivity-datasheet-114679081.pdf?src-supplier=Master+Electronics, ComponentLink5URL=https://datasheet.octopart.com/CRGCQ0603J3M3-TE-Connectivity-datasheet-114679081.pdf?src-supplier=Master+Electronics, Height=550um, Manufacturer Part Number=CRGCQ0603J3M3, Pricing 1="1=0.004, 10=0.0037, 25=0.0033, 100=0.003, 250=0.0027, 500=0.0024, 1000=0.002, 3000=0.0017 (USD)", Stock 1=5000, Supplier 1="Arrow Electronics", Voltage Rating=75V, Voltage Rating (DC)=75V
R4: library part ERJ-2GEJ1R0X, "Res Thick Film 0402 1 Ohm 5% 1/10W -100ppm/ to 600p", Case Code (Imperial)=0402, Case Code (Metric)=1005, Manufacturer=Panasonic, Max Operating Temperature=155°C, Max Power Dissipation=100mW, Min Operating Temperature=-55°C, Package Quantity=1, Ratings=AEC-Q200, Resistance Tolerance=5%, Resistor Type="Thick Film", Temperature Coefficient=600ppm/°C, Voltage Rating=50V, Case/Package=0402, Category="Chip SMD Resistors", ComponentLink1Description=https://datasheet.ciiva.com/34303/1986844-34303545.pdf?src-supplier=Jameco, ComponentLink1URL=https://datasheet.ciiva.com/34303/1986844-34303545.pdf?src-supplier=Jameco, ComponentLink2Description=https://datasheet.ciiva.com/11821/0900766b80f806dd-11821226.pdf?src-supplier=Rs, ComponentLink2URL=https://datasheet.ciiva.com/11821/0900766b80f806dd-11821226.pdf?src-supplier=Rs, ComponentLink3Description=https://datasheet.ciiva.com/43460/1500035-43460348.pdf?src-supplier=Farnell, ComponentLink3URL=https://datasheet.ciiva.com/43460/1500035-43460348.pdf?src-supplier=Farnell, ComponentLink4Description=https://datasheet.ciiva.com/46389/1500035-46389755.pdf?src-supplier=Element14, ComponentLink4URL=https://datasheet.ciiva.com/46389/1500035-46389755.pdf?src-supplier=Element14, ComponentLink5Description=https://datasheet.ciiva.com/6138/1500035-6138734.pdf?src-supplier=Farnell, ComponentLink5URL=https://datasheet.ciiva.com/6138/1500035-6138734.pdf?src-supplier=Farnell, ComponentLink6Description=https://datasheet.ciiva.com/46377/1500035-46377671.pdf?src-supplier=Element14, ComponentLink6URL=https://datasheet.ciiva.com/46377/1500035-46377671.pdf?src-supplier=Element14, ComponentLink7Description=https://datasheet.ciiva.com/28547/1678796-28547147.pdf?src-supplier=Element14, ComponentLink7URL=https://datasheet.ciiva.com/28547/1678796-28547147.pdf?src-supplier=Element14, ComponentLink8Description=https://datasheet.ciiva.com/24068/aoa0000ce1-37422-24068837.pdf?src-supplier=Mouser, ComponentLink8URL=https://datasheet.ciiva.com/24068/aoa0000ce1-37422-24068837.pdf?src-supplier=Mouser, ComponentLink9Description=https://datasheet.ciiva.com/16758/70260739-16758282.pdf?src-supplier=Allied+Electronics, ComponentLink9URL=https://datasheet.ciiva.com/16758/70260739-16758282.pdf?src-supplier=Allied+Electronics, ComponentLink10Description=https://datasheet.ciiva.com/16772/70260739-16772860.pdf?src-supplier=Allied+Electronics, ComponentLink10URL=https://datasheet.ciiva.com/16772/70260739-16772860.pdf?src-supplier=Allied+Electronics, ComponentLink11Description=https://datasheet.ciiva.com/9198/aoa0000ce1-9198901.pdf?src-supplier=Avnet, ComponentLink11URL=https://datasheet.ciiva.com/9198/aoa0000ce1-9198901.pdf?src-supplier=Avnet, ComponentLink12Description=https://datasheet.ciiva.com/48530/aoa0000ce1-48530951.pdf?src-supplier=Avnet, ComponentLink12URL=https://datasheet.ciiva.com/48530/aoa0000ce1-48530951.pdf?src-supplier=Avnet, ComponentLink13Description=https://datasheet.ciiva.com/30245/4aoa0000ce1-30245805.pdf?src-supplier=Onlinecomponents.com, ComponentLink13URL=https://datasheet.ciiva.com/30245/4aoa0000ce1-30245805.pdf?src-supplier=Onlinecomponents.com, Construction=Rectangular, Contact Plating=Tin, Depth=0.5mm, Features="Automotive AEC-Q200", Height=0.35mm, Lead Free="Lead Free", Length=1mm, Manufacturer Part Number=ERJ-2GEJ1R0X, Military Standard=Not, Mount="Surface Mount", Number of Terminations=2, Packaging="Tape and Reel", Power Rating=100mW, Pricing 1="1=0.1, 10=0.024, 50=0.024, 100=0.009, 1000=0.004, 10000=0.003 (USD)", Radiation Hardening=No, Reach SVHC Compliant=No, Resistance=1R, RoHS=Yes, RoHS Compliant=Yes, Series=ERJ, Size Code=0402, Stock 1=285934, Supplier 1=Mouser, Technology="THICK FILM", Termination=SMD/SMT, Tolerance=5%, Voltage Rating (DC)=50V, Width=0.5mm
R5: library part 302-1.1K-RC, "Thick Film Resistors 1/10WATT 1.1KOHMS", Case Code (Imperial)=0603, Case Code (Metric)=1608, Manufacturer=Xicon, Max Operating Temperature=125°C, Min Operating Temperature=-55°C, Package Quantity=5000, Power Rating=100mW, Resistance=1.1kR, Resistor Type="Thick Film", Temperature Coefficient=200ppm/°C, Tolerance=1%, Voltage Rating=50V, Case/Package=0603, Category=Uncategorized, ComponentLink1Description=http://www.mouser.com/ds/2/351/XC-600037-204249.pdf?src-supplier=Mouser, ComponentLink1URL=http://www.mouser.com/ds/2/351/XC-600037-204249.pdf?src-supplier=Mouser, Height=0.45mm, Length=1.6mm, Manufacturer Part Number=302-1.1K-RC, Packaging="Tape and Reel", RoHS=Yes, RoHS Compliant=Yes, Series=CR1-RC, Supplier 1=Mouser, Termination=SMD/SMT, Width=0.8mm
R6: library part RC0603FR-0756KL, "SMD Chip Resistor, 56 kOhm, ± 1%, 100 mW, 0603 [1608 Metric], Thick Film, General Purpose", Case Code (Imperial)=0603, Case Code (Metric)=1608, Manufacturer=Yageo, Max Operating Temperature=155°C, Max Power Dissipation=100mW, Min Operating Temperature=-55°C, Resistance=56kR, Resistance Tolerance=1%, Resistor Type="Thick Film", Temperature Coefficient=100ppm/°C, Voltage Rating=75V, Voltage Rating (AC)=50V, Case/Package=0603, Category="Chip SMD Resistors", ComponentLink1Description=https://datasheet.ciiva.com/2508/pyu-r-int-thick-7-2508519.pdf?src-supplier=Digikey, ComponentLink1URL=https://datasheet.ciiva.com/2508/pyu-r-int-thick-7-2508519.pdf?src-supplier=Digikey, ComponentLink2Description=https://datasheet.ciiva.com/2508/pyu-r-int-thick-7-2508520.pdf?src-supplier=Digikey, ComponentLink2URL=https://datasheet.ciiva.com/2508/pyu-r-int-thick-7-2508520.pdf?src-supplier=Digikey, ComponentLink3Description=https://datasheet.ciiva.com/7746/443971-7746377.pdf?src-supplier=Element14, ComponentLink3URL=https://datasheet.ciiva.com/7746/443971-7746377.pdf?src-supplier=Element14, ComponentLink4Description=https://datasheet.ciiva.com/15189/getdatasheetpartid-329310-15189781.pdf?src-supplier=Verical, ComponentLink4URL=https://datasheet.ciiva.com/15189/getdatasheetpartid-329310-15189781.pdf?src-supplier=Verical, ComponentLink5Description=https://datasheet.ciiva.com/2508/pyu-r-int-thick-7-2508518.pdf?src-supplier=Digikey, ComponentLink5URL=https://datasheet.ciiva.com/2508/pyu-r-int-thick-7-2508518.pdf?src-supplier=Digikey, ComponentLink6Description=https://datasheet.ciiva.com/7746/443971-7746376.pdf?src-supplier=Element14, ComponentLink6URL=https://datasheet.ciiva.com/7746/443971-7746376.pdf?src-supplier=Element14, Construction=Rectangular, Depth=0.8mm, Features="Moisture Resistant", Height=0.45mm, Lead Free=5697LeadFree, Length=1.6mm, Manufacturer Part Number=RC0603FR-0756KL, Military Standard=Not, Number of Pins=2, Number of Terminations=2, Packaging="Tape and Reel", Power Rating=100mW, Pricing 1="5000=0.0015, 75000=0.0014, 200000=0.0013, 500000=0.0013, 1250000=0.0012 (USD)", Reach SVHC Compliant=Unknown, RoHS=Yes, RoHS Compliant=Yes, Series=RC, Size Code=0603, Stock 1=8005000, Supplier 1="Future Electronics", Termination=SMD/SMT, Tolerance=1%, Voltage Rating (DC)=50V, Weight=7.1E-05oz, Width=0.8mm